# Altium PCB PA_Combined_RX_TX.PcbDoc (part 2 of 3)
Units mil, origin at the board's own origin, x right, y up, seen from the top; angles counter-clockwise.
Board outline 4035 x 2725 mil, 4 copper layers (Top Layer, Layer 1, Layer 2, Bottom Layer), stack 23.756 mil thick; 184 components, 134 nets, 615 pads, 730 vias.
Unrouted connection lines stored in the file: 3.
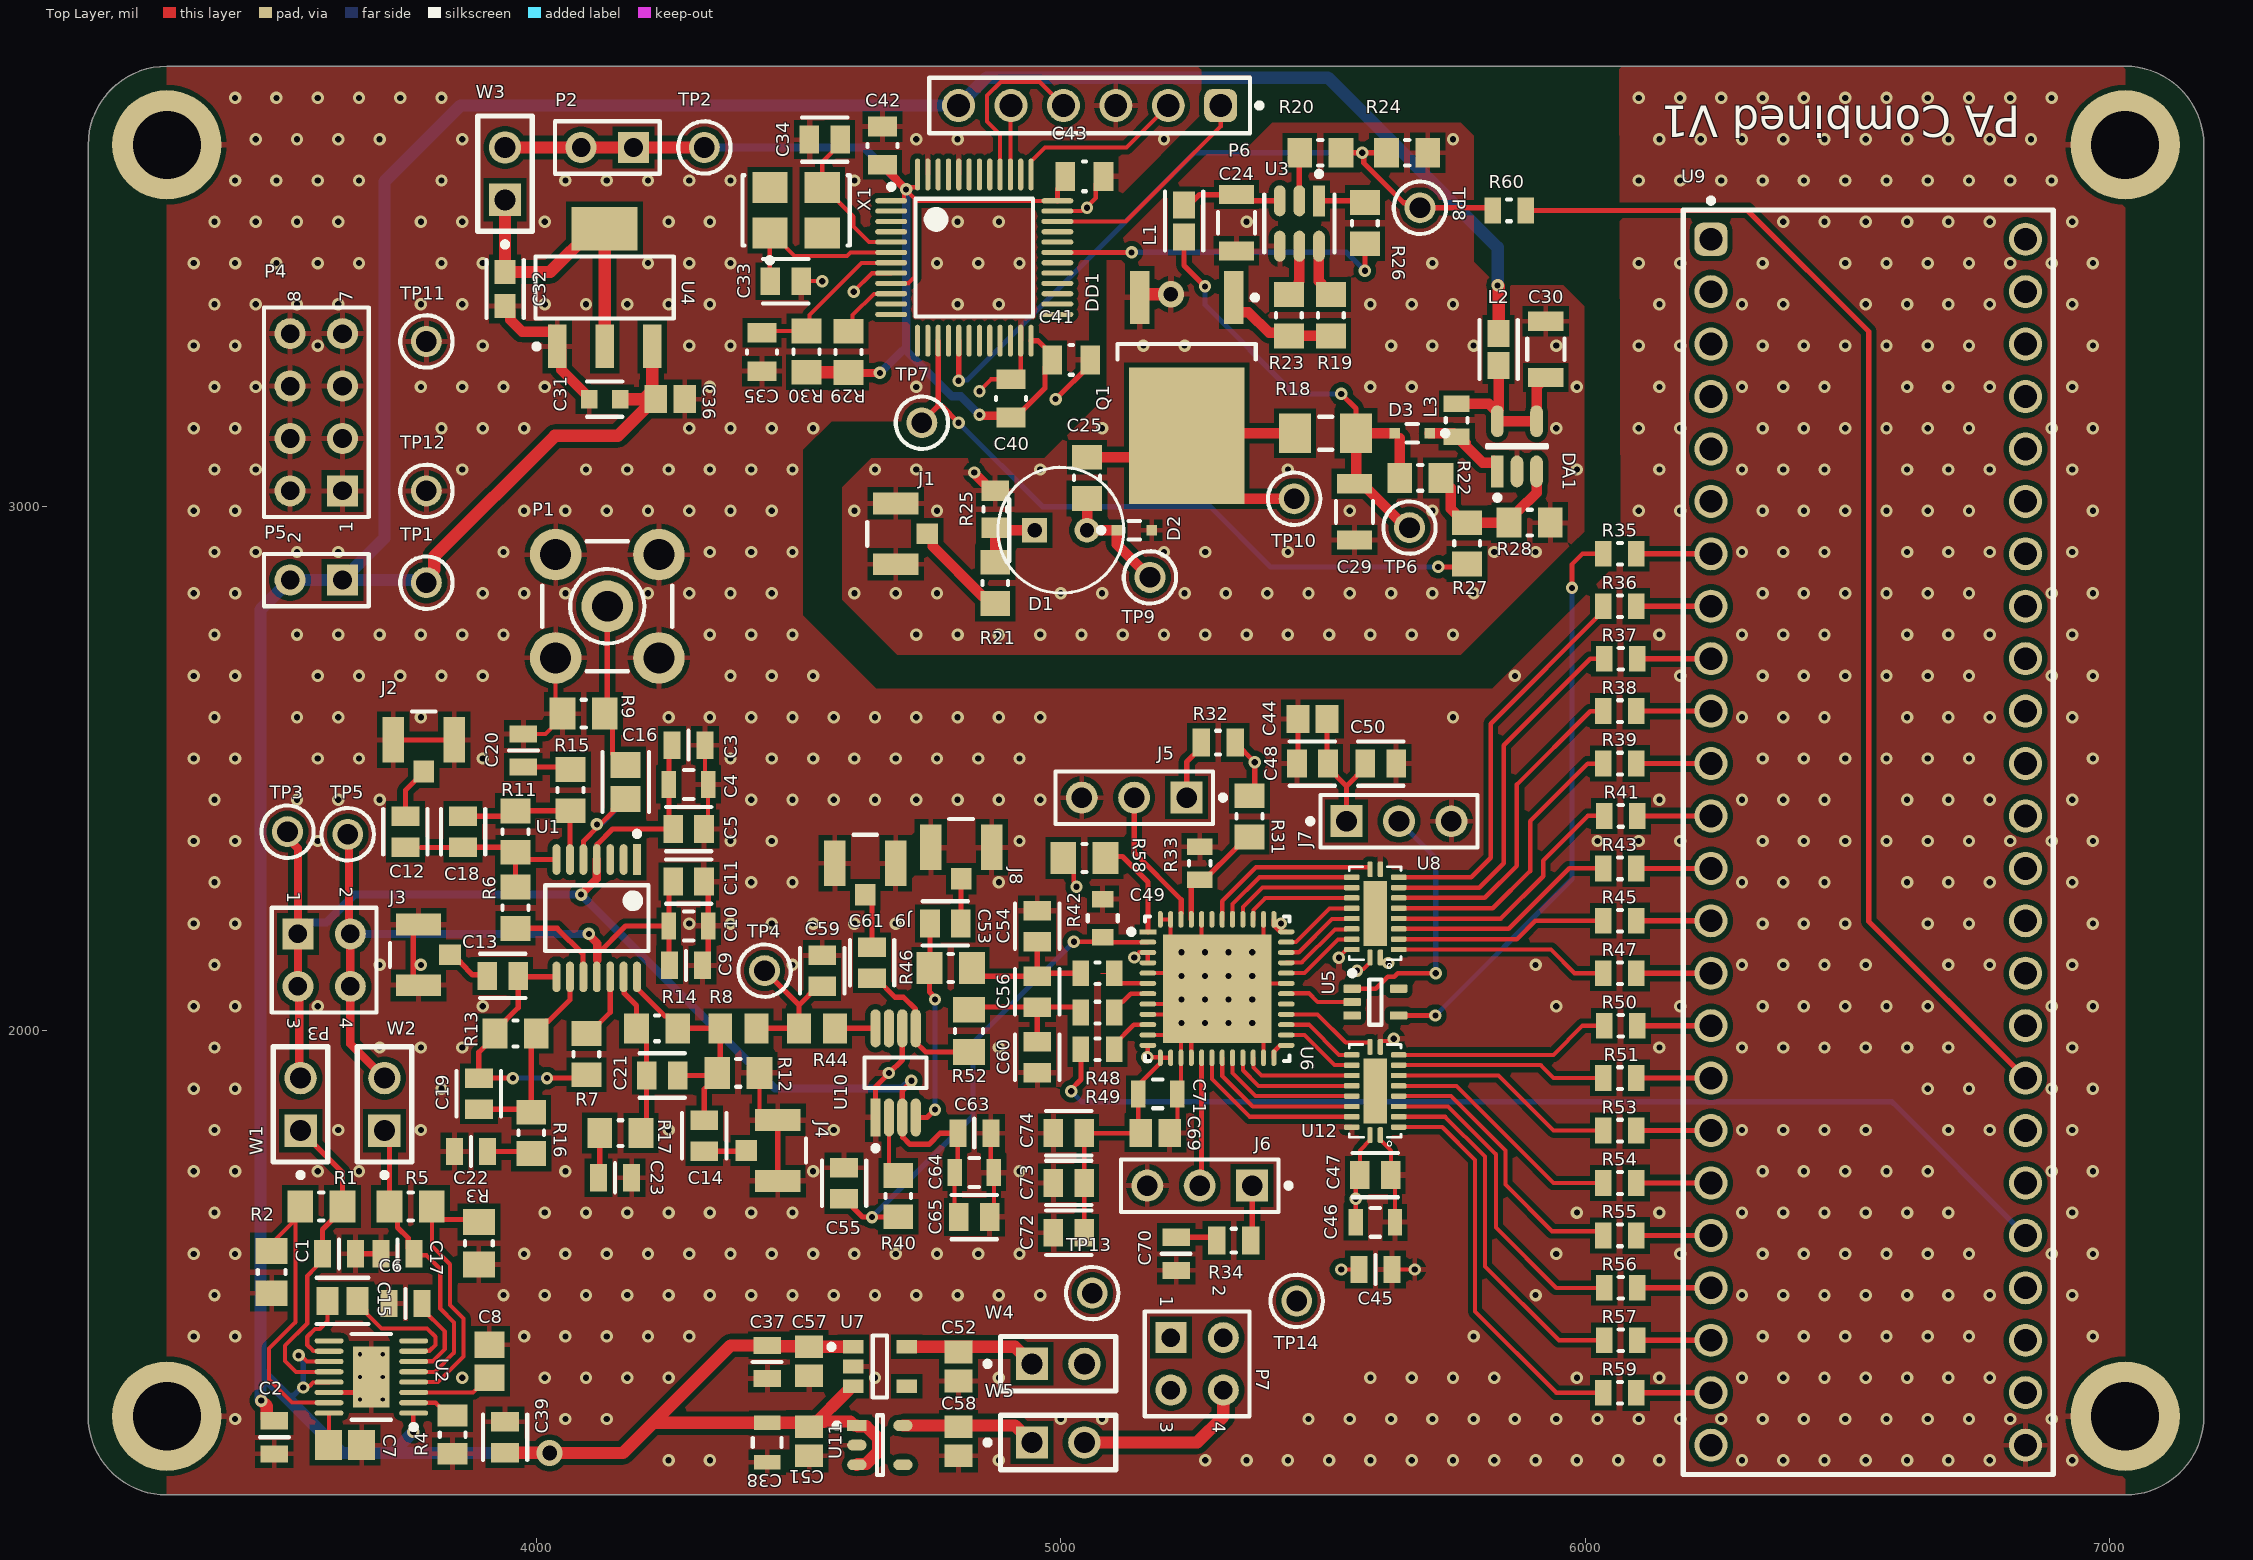
[diagram p0: Top Layer view]

## Part data (continued)
U2: library part CMP-0475-00260-1, "Low Noise Dual Supply Inverting Charge Pump, 4.5 to 32 V Vin, Adjustable Vout, 16-pin SOP (MSE-16-EDP), -40 to 125 degC, Pb-Free, Tape and Reel", Frequency(kHz)=500, Manufacturer="Linear Technology", ComponentLink1Description="Manufacturer URL", ComponentLink1URL=http://www.linear.com/, ComponentLink2Description=Datasheet, ComponentLink2URL=http://cds.linear.com/docs/en/datasheet/3260fa.pdf, ComponentLink3Description="Package Specification", ComponentLink3URL=http://cds.linear.com/docs/en/packaging/05081667_F_MSE16.pdf, DatasheetVersion="Rev. A", Ishutdown(uA)=2, Isupply(mA)=0.1, Max Iout(mA)=100, Mounting Technology="Surface Mount", PackageDescription="16-Pin Plastic MSOP, Exposed Die Pad, Body 4.039 x 3 mm, Pitch 0.5 mm", PackageReference=MSE-16, PackageVersion="Rev. F, 05/2013", Packing="Tape and Reel", PartNumber=LTC3260EMSE#TRPBF, RoHS=TRUE, Vin Max(V)=32, Vin Min(V)=4.5, Voutput=Adj
U3: library part CMP-04912-000077-1, "IC GATE DRVR LOW-SIDE SOT23-6", Case/Package=SOT-23-6, Max Operating Temperature=125°C, Max Supply Voltage=35V, Min Operating Temperature=-40°C, Min Supply Voltage=10V, Operating Supply Voltage=32V, Output Current=5A, Package Quantity=1, Fall Time=7ns, Lead Free="Lead Free", Mount="Surface Mount", Number of Channels=1, Number of Drivers=1, Number of Outputs=2, Number of Pins=6, Packaging="Tape and Reel", Rise Time=15ns, RoHS Compliant=Yes, Series=-, Turn-Off Delay Time=17ns, Turn-On Delay Time=26ns
U4: library part CMP-0244-00310-1, "Fixed Low Drop Positive Voltage Regulator, 3.3V, 4-Pin SOT-223, Tape and Reel", ComponentLink1Description="Manufacturer URL", ComponentLink1URL=http://www.st.com, ComponentLink2Description=Datasheet, ComponentLink2URL=http://www.st.com/internet/com/TECHNICAL_RESOURCES/TECHNICAL_LITERATURE/DATASHEET/CD00000544.pdf, DatasheetVersion=1/11/2011, PackageDescription="4-Pin SOT-223 Package, 6.5 x 3.5 mm Body, 2.3 mm Pitch, 7 mm Lead Span", PackageReference=SOT-223, PackageVersion=2010
U5: library part CMP-0859-00373-3, "Single 2-Input Exclusive-OR Gate, DCK0005A, LARGE T&R", F @ Nom Voltage(Max)(Mhz)=250, Generic Part Number=SN74AUC1G86, ICC @ Nom Voltage(Max)(mA)=0.01, Manufacturer="Texas Instruments", Operating Temperature Range(C)="-40 to 85", Rating=Catalog, tpd @ Nom Voltage(Max)(ns)=5.5,3.8,2.6,1.7,1.3, Voltage(Nom)(V)=0.8,1.2,1.5,1.8,2.5, 3-State Output=No, Bits(#)=1, DatasheetVersion=SCES389J, Gate Type=XOR, Input Type=CMOS, Logic=True, Output Drive (IOL/IOH)(Max)(mA)=9/-9, Output Type=CMOS, PackageReference=DCK0005A, Schmitt Trigger=No, Sub-Family="XOR Gate", Technology Family=AUC, VCC(Max)(V)=2.7, VCC(Min)(V)=0.8
U6: library part CMP-09081-000363-1, "IC ADC 16BIT PIPELINED 48QFN", Case/Package=QFN, Max Operating Temperature=75°C, Max Power Dissipation=264mW, Min Operating Temperature=0°C, Package Quantity=2000, Interface=Parallel, Mount="Surface Mount", Number of Bits=16, Number of Converters=1, Number of Pins=48, Packaging="Tape and Reel", RoHS Compliant=Yes, Sampling Rate=25000000S/s, Supply Type=Single
U7: library part CMP-06324-000075-1, "IC REG LINEAR 3V 300MA SOT23-5", Case/Package=SOT-23-5, Dropout Voltage=160mV, Max Operating Temperature=125°C, Min Current Limit=400mA, Min Operating Temperature=-40°C, Output Current=300mA, Output Voltage=3V, Mount="Surface Mount", Number of Regulators=1, Packaging="Tape and Reel", RoHS Compliant=Yes
U8 U12: "IC TXRX NON-INVERT 3.6V 20-DQFN"
U10: library part CMP-09116-000202-1, "IC OPAMP DIFF 1 CIRCUIT 8MSOP", RoHS Compliant=Yes
U11: library part CMP-06324-000114-1, "IC REG LIN 3.3V 150MA TSOT23-5", Case/Package=SOT-23-5, Dropout Voltage=155mV, Max Input Voltage=5.5V, Max Operating Temperature=125°C, Min Current Limit=200mA, Min Input Voltage=2.5V, Min Operating Temperature=-40°C, Min Output Voltage=3.3V, Output Current=150mA, Output Voltage Accuracy=2%, Package Quantity=1, Power Supply Rejection Ratio (PSRR)=65dB, Quiescent Current=39uA, Mount="Surface Mount", Number of Outputs=1, Number of Pins=23, Number of Regulators=1, Output Configuration=Positive, Output Type=Fixed, Output Voltage=3.3V, Packaging="Tape and Reel", Polarity=Positive, Radiation Hardening=No, RoHS Compliant=Yes, Series=-
W1 W2 W3 W4 W5: "Jumper Wire", LatestRevisionDate=17-Jul-2002, LatestRevisionNote="Re-released for DXP Platform.", PackageDescription="Radial Cap, Thru-Hole; 2 Leads; 0.2 in Pin Spacing", PackageReference=RAD-0.2, Published=24-Mar-1999, Publisher="Altium Limited"
X1: library part Quartz_SX-6, "Quartz_SX-6 (SMD06035C4)"
D2 D3: AF=1, BV=0, BV_MAX=1e99, CJO=0, CJP=0, CTA=0, CTP=0, EG=1.11, FC=0.5, FCS=0.5, FV_MAX=1e99, IBV=0.001, IKF=0, IKR=0, IS=1e-14, ISR=1e-14, JSW=0, JTUN=0, JTUNSW=0, KEG=1, KF=0, LEVEL=1, MJSW=0.33, N=1, NBV=1, NR=1, NS=1, NTUN=30, PHP=1, RS=0, SimulationGenericComponent=True, TCV=0, TLEV=0, TLEVC=0, TM1=0, TM2=0, TNOM=27, TPB=0, TPHP=0, TRS=0, TRS2=0, TT=0, TTT1=0, TTT2=0, VJ=1, XTI=3, XTITUN=3
L3: SimulationGenericComponent=True
R33: SimulationGenericComponent=True, TC1=0, TC2=0

## Free pads (board coordinates)
  round 208.66 hole 129.92 unplated: 1(3295,1265) 1(3295,3690) 1(7030,1265) 1(7030,3690)

## Via types
v1: diameter 23.62, hole 11.81, Top Layer to Bottom Layer, tented both sides, 656 vias
v2: diameter 23.62, hole 11.81, Top Layer to Bottom Layer, 66 vias
v3: diameter 19.68, hole 7.87, Top Layer to Bottom Layer, 6 vias
v4: diameter 50, hole 28, Top Layer to Bottom Layer, 2 vias

## Nets (pads, with @x,y where several pads share a name; then routed paths per layer and width w, separated by ;. In a path a pad name is that pad's centre, name@x,y a point inside that pad or via, vN(x,y) a via of type N, cw(c..) or ccw(c..) an arc to the next point about the centre after c; other vN are vias at no path point)
3V3: C40.1 C41.1 C42.1 C43.1 DD1.1 DD1.9 DD1.24 DD1.36 DD1.48 P2.1 P2.2 R29.1 R30.1 TP2.1 W3.2 | length 2490.6
  Top Layer w7.87: DD1.1@4676.54,3583.27 4699.89,3583.27 4700.8,3584.18 4700.8,3596.53 v2@4701.99,3597.73 ; DD1.9@4700,3424.96 4701.2,3426.16 4709.49,3426.16 4720.98,3437.66 4720.98,3587.58 ; v2(4705,3605) 4705,3603.56 4720.98,3587.58 ; v2@4705,3608.01 4712.27,3608.01 4713.47,3609.2 4725.82,3609.2 4726.73,3610.11 DD1.48@4726.73,3633.46 ; DD1.48@4725.82,3640 4726.73,3639.09 DD1.48@4726.73,3633.46 ; DD1.48@4726.73,3607.87 DD1.48@4726.73,3633.46 ; DD1.36@4993.46,3583.27 4725.3,3583.27 4720.98,3587.58
  Top Layer w10: C40.1@4905,3170 4913.86,3170 4969.88,3226.02 4969.88,3266.3 C41.1@4983.58,3280 4983.58,3288.86 4955.9,3316.54 DD1.24@4943.27,3316.54 ; DD1.36@4993.46,3583.27 4993.46,3606.02 5008.58,3621.14 C43.1@5008.58,3630
  Top Layer w15.75: R29.1@4580,3255.95 4580.94,3255 v2(4655,3255) ; C42.1@4660,3652.16 4660.26,3652.16 4671.08,3641.34 4671.08,3638.92 v2(4705,3605) ; v2(4845,3175) 4846.51,3173.49 4901.51,3173.49 C40.1@4905,3170
  Top Layer w23.62: W3.2@3940,3685 P2.2@4085,3685 P2.1@4185,3685 TP2.1@4320.21,3685 TP2.1@4325.41,3685 ; R30.1@4515,3256.26 4515.31,3255.95 R29.1@4580,3255.95
  Bottom Layer w15.75: TP2.1@4320.21,3685 4625,3685 v2(4705,3605) 4705,3298.02 ; v2(4655,3255) 4698.02,3298.02 4705,3298.02 ; v2(4845,3175) 4809.69,3210.32 4792.7,3210.32 4705,3298.02
+5V: C3.1 C4.1 C5.1 C63.1 C64.1 C65.1 P3.1 P3.3 TP3.1 U1.4 U10.3 W1.2 | length 2671.8
  Top Layer w7.87: C63.1@4803.5,1805 4803.5,1735.91 C64.1@4797.6,1730 4797.6,1652.87 C65.1@4805.47,1645
  Top Layer w10: U1.4@4115.11,2326.97 4115.95,2327.81 4115.95,2355.84 4145.12,2385 C5.1@4260.47,2385 4252.6,2392.87 C4.1@4252.6,2470 4252.6,2539.09 C3.1@4258.5,2545 ; v2(4715,1905) 4715,1903.4 4697.8,1886.19 U10.3@4697.8,1834.97 4698.64,1834.12 4698.64,1797.38 4712.29,1783.74 4748.74,1783.74 4770,1805 C63.1@4803.5,1805
  Top Layer w15.75: TP3.1@3525,2380 3525,2368.28 3545,2348.28 P3.1@3545,2185 P3.3@3545,2085 3547.5,2082.5 3547.5,1912.5 W1.2@3550,1910 ; v2(4085,2260) 4114.78,2289.78 4114.78,2326.64 U1.4@4115,2326.86
  Bottom Layer w15.75: P3.1@3545,2185 3566.65,2206.65 3599.62,2206.65 3652.96,2260 v2(4085,2260) 4455,1890 4697.87,1890 4712.87,1905 v2(4715,1905)
-5V: C9.1 C10.1 C11.1 P3.2 P3.4 TP5.1 U1.11 W2.2 | length 1371.5
  Top Layer w10: U1.11@4115,2103.14 4115.95,2104.1 4115.95,2135 4115.95,2145.95 4170,2200 C10.1@4252.6,2200 ; C9.1@4253.5,2125 4252.6,2125.91 C10.1@4252.6,2200 ; C11.1@4260.47,2285 4252.6,2277.13 C10.1@4252.6,2200
  Top Layer w15.75: TP5.1@3640,2375 3642.5,2372.5 3642.5,2187.5 P3.2@3645,2185 P3.4@3645,2085 3645,1975 W2.2@3710,1910 ; v2(4100,2185) 4100,2182.87 4115.95,2166.91 4115.95,2135
  Bottom Layer w15.75: P3.2@3645,2185 v2(4100,2185)
ADC_AVDD: C69.2 C70.1 C71.1 C72.1 C73.1 C74.1 P7.1 P7.3 R31.2 R32.2 R34.2 R58.2 TP13.1 U6.3 U6.4 U6.12 U6.13 U6.14 W4.2 | length 845.3
  Top Layer w8.66: R58.2@5004.65,2330 5024.92,2309.72 5024.92,2284.13 5030,2279.05 v2(5030,2275) ; C72.1@5045,1615 5044.53,1615.47 C73.1@5044.53,1710 C74.1@5044.53,1805 5150,1805 5147.6,1807.4 C71.1@5147.6,1880 ; v2(5140,2140) 5149.69,2149.69 U6.3@5166.12,2149.69 U6.4@5166.12,2130 ; C71.1@5142.6,1880 5142.6,1891.81 5188.3,1937.52 5189.39,1937.52 5189.79,1937.92 U6.13@5189.79,1948.85 ; U6.12@5166.12,1972.52 5165.97,1972.52 5165.56,1972.11 5165.56,1950.56 v2(5165,1950) 5165.57,1949.42 5189.39,1949.42 5189.79,1949.02 U6.13@5189.79,1948.85 ; U6.14@5209.48,1948.85 U6.13@5189.79,1948.85 ; R34.2@5291.02,1606.5 R34.2@5297.52,1600 ; R31.2@5360,2448.74 R31.2@5370,2458.74
  Top Layer w10: C70.1@5220,1606.5 R34.2@5291.02,1606.5 ; R32.2@5332.48,2550 v2(5370,2512.48) R31.2@5370,2458.74
ADC_CLKIN: R49.1 U9.29 | length 2021.8
  Top Layer w10: v2(5020,1885) 5020,1888.69 5038.5,1907.19 R49.1@5038.5,1965
  Bottom Layer w10: v2(5020,1885) 5040,1865 6228.3,1865 ccw(c6240,1910) 6251.7,1865 6585,1865 6587.93,1862.07 v2(6840,1610)
ADC_CLKOUT: U5.2 U6.30 | length 133.1
  Top Layer w7.87: U6.30@5430,2070.95 5441.62,2070.95 5442.59,2071.92 5473.08,2071.92 5490,2055 U5.2@5555.71,2055
ADC_CLKOUT_F: R35.1 U5.4 | length 1106.1
  Top Layer w8.66: U5.4@5644.29,2029.41 v2(5714.41,2029.41) ; v2(5975,2845) 5975,2890 5995,2910 R35.1@6035,2910
  Bottom Layer w10: v2@5715,2030 5975,2290 v2(5975,2845)
ADC_DITH: J6.2 U6.17 | length 245.3
  Top Layer w10: J6.2@5265,1705 5268.53,1708.53 U6.17@5268.53,1948.85
ADC_MODE: R31.1 R33.2 U6.45 | length 214.2
  Top Layer w8.66: R33.2@5248.85,2277.09 5260.27,2288.5 R33.2@5265,2288.5 R33.2@5273.86,2288.5 ; R31.1@5335.79,2350.43 5335.79,2350.71 5355.08,2370 R31.1@5360,2370
  Top Layer w10: U6.45@5248.85,2212.73 R33.2@5248.85,2277.09 ; R33.2@5273.86,2288.5 R31.1@5335.79,2350.43
ADC_OVDD: C44.2 C45.1 C46.1 C47.1 C48.1 C50.1 J7.1 P7.2 P7.4 TP14.1 U6.24 U6.25 U6.36 U6.37 U8.20 U12.20 W5.2 | length 950.1
  Top Layer w7.87: C48.1@5507.56,2511.97 C48.1@5509.53,2510 C48.1@5509.53,2502.13 ; v2(5535,1545) C45.1@5568.5,1545 ; C46.1@5562.6,1635 v2(5562.6,1680) 5562.6,1717.13 C47.1@5570.47,1725 5570.47,1772.21 5589.84,1791.58 U12.20@5589.84,1801.42 ; v2(5565,2115) 5568.01,2118.01 5577.54,2118.01 5589.84,2130.31 U8.20@5589.84,2140.16 ; C50.1@5580.47,2502.13 C50.1@5580.47,2510
  Top Layer w8.66: U6.24@5406.33,1948.85 5406.33,1960.01 5418.84,1972.52 U6.25@5430,1972.52 ; U6.37@5406.33,2212.73 5406.33,2201.56 5413.95,2193.95 ; v2(5420,2205) 5420,2200.95 5413.95,2194.9 5413.95,2193.95 ; U6.36@5430,2189.06 5418.84,2189.06 5413.95,2193.95
  Top Layer w10: C48.1@5507.56,2511.97 C44.2@5507.56,2595 ; C48.1@5509.53,2502.13 5545,2466.65 ; J7.1@5545,2400 5545,2466.65 ; C50.1@5580.47,2502.13 5545,2466.65
  Top Layer w23.62: W5.2@5045,1215 5260,1215 5310,1265 P7.4@5310,1315
ADC_RAND: J5.2 U6.46 | length 257.2
  Top Layer w10: J5.2@5140,2445 5140,2340 5229.75,2250.25 U6.46@5229.75,2225